# Altium PCB EMG V2.PcbDoc
Units mm, origin at the board's own origin, x right, y up, seen from the top; angles counter-clockwise.
Board outline 20 x 15 mm, 4 copper layers (Top Layer, GND, VCC, Bottom Layer), stack 0.604 mm thick; 34 components, 25 nets, 92 pads, 17 vias.
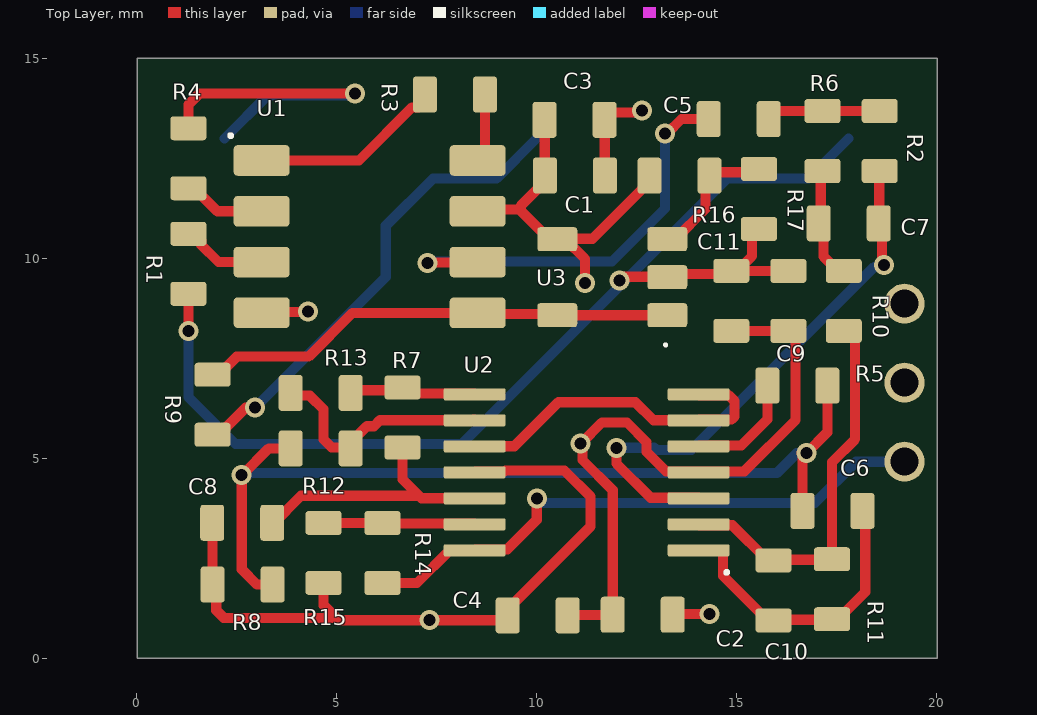
[diagram p0: Top Layer view]
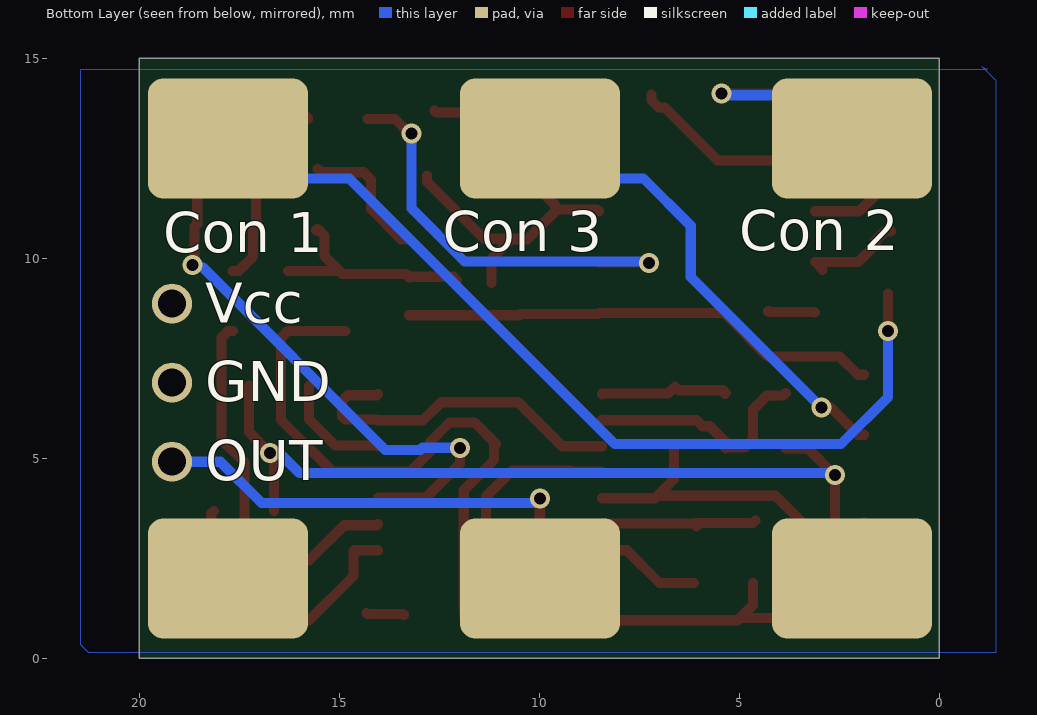
[diagram p1: Bottom Layer view, seen from below]
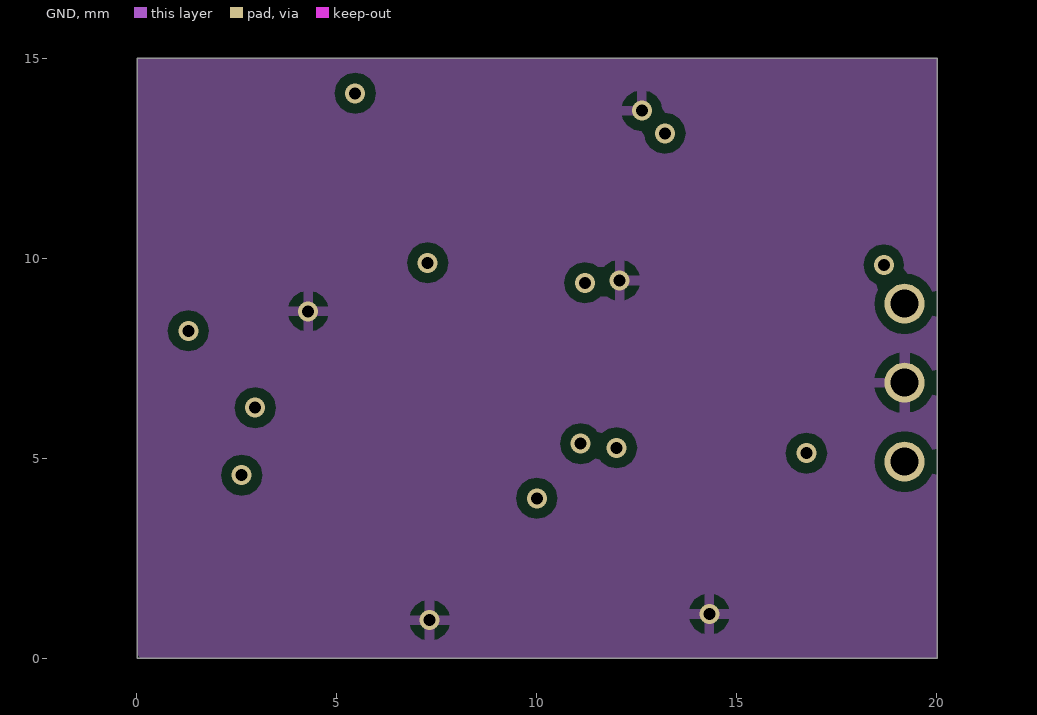
[diagram p2: GND]
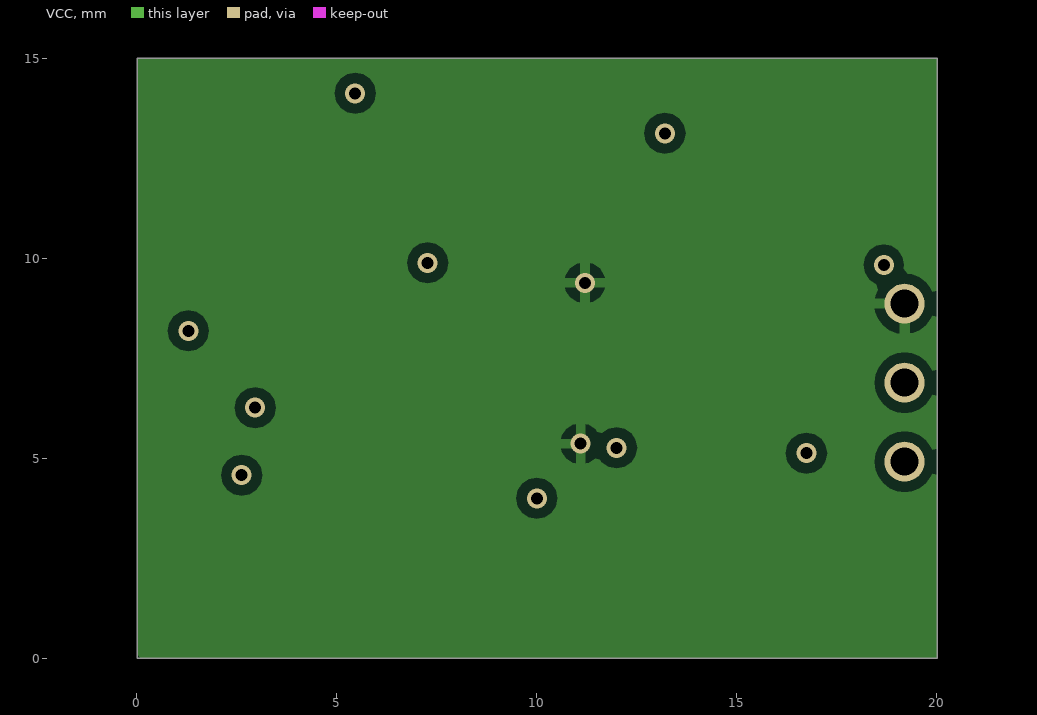
[diagram p3: VCC]

## Layer stack, top to bottom
Top Solder: solder mask 0.01, Solder Resist, Dk 3.5
Top Layer: signal copper 0.036
Dielectric 2: prepreg 0.071, PP-006, Dk 4.1
GND: signal copper 0.035
Dielectric 1: dielectric 0.32, FR-4, Dk 4.8
VCC: signal copper 0.035
Dielectric 3: prepreg 0.071, PP-006, Dk 4.1
Bottom Layer: signal copper 0.036
Bottom Solder: solder mask 0.01, Solder Resist, Dk 3.5

## Board outline
0.018,0.011 20.017,0.011 20.018,0.012 20.018,15.011 0.019,15.011 0.019,0.012

## Design rules (kind name [scope] priority, off if disabled: settings)
Clearance [All] p1: gap=0.254 ignorepadtopadclearanceinfootprint=FALSE except(0: Arc-Hole Track-Hole SMDPad-Hole THPad-Hole Via-Hole Fill-Hole Poly-Hole Region-Hole Text-Hole)
PolygonConnect [All] p1: connectstyle=Relief reliefconductorwidth=0.254 reliefentries=4 polygonreliefangle="90 Angle" airgapwidth=0.254
RoutingVias [All] p1: holewidth=0.711 width=1.27 viastyle="Through Hole" minholewidth=0.711 minwidth=1.27 maxholewidth=0.711 maxwidth=1.27
SolderMaskExpansion [All] p1: expansion=0.102 istentingtop=FALSE
Width [All] p1: maxlimit=0.254 minlimit=0.254 preferedwidth=0.254
30 further rules are at their usual default settings.

## Components (designator, comment, footprint, x,y, rotation, side; value= is the part's Value field where it differs from the comment)
C1 "1uF/50V" "0603 Capacitor" 10.96,12.074 r0 top value=1uF
C2 "1uF/50V" "0603 Capacitor" 12.654,1.094 r0 top value=1uF
C3 "10nF/50V" "0603 Capacitor" 10.95,13.467 r0 top value=10nF
C4 "10nF/50V" "0603 Capacitor" 10.028,1.078 r180 top value=10nF
C5 "220nF/25V" "0603 Capacitor" 15.055,13.486 r0 top value=220nF
C6 "10uF/25V" "0603 Capacitor" 17.397,3.689 r180 top value=10uF
C7 "220nF/25V" "0603 Capacitor" 17.805,10.878 r180 top value=220nF
C8 "10uF/25V" "0603 Capacitor" 2.642,3.392 r180 top value=10uF
C9 "10nF/50V" "0603 Capacitor" 16.296,8.941 r90 top value=10nF
C10 "22nF/25V" "0603 Capacitor" 15.924,1.703 r270 top value=22nF
C11 "1uF/50V" "0603 Capacitor" 14.869,8.941 r90 top value=1uF
"Con 1" "EMG Pad" PCBComponent_1 17.8,13 r180 bottom
"Con 2" "EMG Pad" PCBComponent_1 2.2,13 r180 bottom
"Con 3" "EMG Pad" PCBComponent_1 10,13 r180 bottom
R1 "100k" "0603 Resistor" 1.296,9.868 r90 top
R2 "2k5" "0603 Resistor" 18.579,12.937 r270 top
R3 "10k" "0603 Resistor" 7.96,14.101 r0 top
R4 "100k" "0603 Resistor" 1.296,12.506 r270 top
R5 "1k" "0603 Resistor" 16.521,6.822 r180 top
R6 "150k" "0603 Resistor" 17.152,12.937 r270 top
R7 "10k" "0603 Resistor" 6.648,6.026 r270 top
R8 "1k" "0603 Resistor" 2.65,1.847 r180 top
R9 "100k" "0603 Resistor" 1.901,6.344 r90 top
R10 "5k" "0603 Resistor" 17.682,8.941 r270 top
R11 "250k" "0603 Resistor" 17.387,1.732 r270 top
R12 "1k" "0603 Resistor" 4.604,5.253 r0 top
R13 "1k" "0603 Resistor" 4.604,6.639 r0 top
R14 "3k" "0603 Resistor" 6.149,2.639 r270 top
R15 "330R" "0603 Resistor" 4.677,2.639 r270 top
R16 "10k" "0603 Resistor" 13.575,12.07 r0 top
R17 "10k" "0603 Resistor" 15.562,11.49 r270 top
U1 "LT178910" "SOIC 8 LT178910" 5.828,10.546 r270 top
U2 "OPA4817" "TSSOP14 OPA4187" 11.253,4.655 r90 top
U3 "OPA187" SOT23-5 11.893,9.533 r180 top

## Footprints (in the part's own frame and the unit in brackets; to place one, negate y for a bottom-side part, rotate by r counter-clockwise, add the part's x,y. Pads: shape width x height; smd on the part's side, far side on the other; paste and mask are expansions set on the pad)
"0603 Capacitor" [mm] "0603 Capacitor"
  rrect25% 0.6x0.9 smd paste-0.05 mask+0.075: 1(-0.75,0) 2(0.75,0)
  body extent -0.77,-0.43 0.77,0.43, height 0.45
"0603 Resistor" [mm] "0603 Resistor"
  rrect25% 0.6x0.9 smd paste-0.05 mask+0.075: 1(-0.75,0) 2(0.75,0)
  body extent -0.77,-0.43 0.77,0.43, height 0.45
PCBComponent_1 [mm]
  rrect25% 4x3 smd paste-0.05 mask+0.075: 1(0,0) 2(0,-11)
"SOIC 8 LT178910" [mm] "SOIC 8"
  rrect25% 0.765x1.4 smd paste-0.05 mask+0.075: 1(-1.905,-2.7) 2(-0.635,-2.7) 3(0.635,-2.7) 4(1.9,-2.7) 5(1.905,2.7) 6(0.635,2.7) 7(-0.635,2.7) 8(-1.905,2.7)
  silkscreen extent -2.56,-3.51 -2.49,-3.44, body extent -2.5,-3.08 2.5,3.08, height 2
SOT23-5 [mm] "SOT23-5"
  rrect25% 1x0.6 smd paste-0.05 mask+0.075: 1(-1.375,0.95) 2(-1.375,0) 3(-1.375,-0.95) 4(1.375,-0.95) 5(1.375,0.95)
  silkscreen extent -1.34,1.68 -1.32,1.71, body extent -1.58,-1.5 1.62,1.5, height 0.92
"TSSOP14 OPA4187" [mm] "TSSOP14"
  rrect25% 0.3x1.55 smd paste-0.05 mask+0.075: 1(-1.95,-2.8) 2(-1.3,-2.8) 3(-0.65,-2.8) 4(0,-2.8) 5(0.65,-2.8) 6(1.3,-2.8) 7(1.95,-2.8) 8(1.95,2.8) 9(1.3,2.8) 10(0.65,2.8) 11(0,2.8) 12(-0.65,2.8) 13(-1.3,2.8) 14(-1.95,2.8)
  silkscreen extent -2.54,-3.54 -2.46,-3.46, body extent -2.5,-3.2 2.5,3.2, height 1.21

## Part data
C1 C2 C3 C4 C9 C11: Capacitor Type=Ceramic, Dielectryc=X7R, Manufacturer=Any, Package=0603, Temperature="-55ºC TO +125ºC", Tolerance=20%, Voltage=50V, Manufacturer PN=Any, Mount Type=SMD
C5 C6 C7 C8 C10: Capacitor Type=Ceramic, Dielectryc=X7R, Manufacturer=Any, Package=0603, Temperature="-55ºC TO +125ºC", Tolerance=20%, Voltage=25V, Manufacturer PN=Any, Mount Type=SMD
"Con 1" "Con 2" "Con 3": library part Pad
R1 R2 R4 R6 R9: Manufacturer=Any, Package=0603, Power Dissipation="1/10 W", Temperature="-55°C to 155°C", Tolerance=10%, Manufacturer PN=Any, Mount Type=SMD
  R1 R4 R9: 150k=100k
  R6: 150k=150k
R3 R5 R7 R8 R10 R11 R12 R13 R14 R15 R16 R17: Manufacturer=Any, Package=0603, Power Dissipation="1/10 W", Temperature="-55ºC TO 155ºC", Tolerance=10%, Manufacturer PN=Any, Mount Type=SMD
U1: library part LT178910-2, "Micropower, Single Supply Rail-to-Rail, Output Instrumentation Amplifiers", Manufacturer="Linear Technologiy", Output Current=1mA, Package="SOIC 8", Voltage Range="-36V to 36 V", IC Type=INA, Mount Type=SMD
U2: library part OPA4817-2, "OPAx187, Low Power, Rail-to-Rail Output,36-V Operational Amplifiers", Manufacturer="TEXAS INSTRUMENTS", Output Current="20 mA", Package=TSSOP14, Voltage Range="2.25V to 18V", IC Type=OPAMP, Mount Type=SMD
U3: library part OPA187-2, "OPAx187, Low Power, Rail-to-Rail Output,36-V Operational Amplifiers", Manufacturer="TEXAS INSTRUMENTS", Output Current="20 mA", Package="SOT 23-5", Voltage Range="2.25V to 18V", IC Type=OPAMP, Manufacturer PN=OPA187, Mount Type=SMD

## Free pads (board coordinates)
  round 1 hole 0.7: 1(19.2,4.919) 1(19.2,6.894) 1(19.2,8.87)

## Via types
v1: diameter 0.5, hole 0.3, Top Layer to Bottom Layer, 10 vias
v2: diameter 0.5, hole 0.3, Top Layer to GND, 5 vias
v3: diameter 0.5, hole 0.3, Top Layer to VCC, 2 vias

## Nets (pads, with @x,y where several pads share a name; then routed paths per layer and width w, separated by ;. In a path a pad name is that pad's centre, name@x,y a point inside that pad or via, vN(x,y) a via of type N, cw(c..) or ccw(c..) an arc to the next point about the centre after c; other vN are vias at no path point)
+5: C1.1 C2.1 C3.1 C4.1 C9.1 C11.1 pad.1@19.2,8.87 R16.1 U1.7 U2.4 U3.4 | length 25.6
  Top Layer w0.254: U1.7 8.572,11.225 9.609,11.225 ; C3.1 10.205,13.462 10.205,11.919 9.609,11.323 9.609,11.225 ; C4.1 10.786,1.086 11.896,1.086 11.896,1.236 11.904,1.244 11.904,4.209 11.15,4.963 11.15,5.322 v3(11.103,5.369) 11.633,5.899 12.26,5.899 12.749,5.41 12.749,5.167 13.238,4.678 14.03,4.678 U2.4 14.076,4.678 15.192,4.678 16.476,5.962 16.476,8.018 16.303,8.191 C9.1 C11.1 ; v3(11.211,9.39) 11.211,9.99 10.718,10.483 U3.4 ; R16.1 12.825,11.92 11.399,10.494 10.718,10.494 10.529,10.494 U3.4 ; 9.609,11.225 9.609,11.192 10.318,10.483 U3.4
GND: C1.2 C2.2 C3.2 C4.2 C8.2 C9.2 C11.2 pad.1@19.2,6.894 R8.2 R15.2 R17.2 U1.4 U2.11 U3.2 | length 27.5
  Top Layer w0.254: R8.2@1.889,1.858 1.896,1.865 1.896,3.388 C8.2 ; R8.2@1.993,1.754 1.993,1.203 2.179,1.016 4.991,1.016 ; U1.4 3.146,8.664 4.275,8.664 v2(4.292,8.681) ; R15.2 4.677,1.33 4.991,1.016 ; U2.11 8.476,4.678 9.199,4.678 9.221,4.7 10.695,4.7 11.353,4.042 11.353,3.303 C4.2@9.278,1.228 ; C4.2 9.157,0.957 v2(7.326,0.957) 5.051,0.957 4.991,1.016 ; C1.2@11.705,12.167 11.705,13.462 C3.2 11.7,13.475 11.873,13.648 12.587,13.648 v2(12.634,13.695) ; v2(12.077,9.451) 12.169,9.543 13.258,9.543 U3.2 13.347,9.612 14.94,9.612 C11.2@15.019,9.691 ; C2.2 13.422,1.112 v2(14.319,1.112) v2@14.337,1.13 ; R17.2@15.597,10.705 R17.2 15.56,10.74 15.387,10.567 15.387,10.059 C11.2@15.019,9.691 ; C9.2 C11.2@15.019,9.691
NetC5_1: C5.1 U1.6 | length 10.9
  Top Layer w0.254: v1(7.276,9.89) 7.287,9.901 8.517,9.901 U1.6 ; v1(13.21,13.131) 13.269,13.131 13.624,13.486 C5.1
  Bottom Layer w0.254: v1(7.276,9.89) 7.311,9.925 11.886,9.925 13.21,11.249 v1(13.21,13.131)
NetC5_2: C5.2 R2.1 R6.1 | length 3
  Top Layer w0.254: C5.2@15.825,13.506 C5.2 15.805,13.514 15.978,13.687 R6.1 18.447,13.687 18.458,13.698 18.524,13.632 R2.1
NetC6_1: C6.1 C10.2 R11.2 U2.1 | length 7.5
  Top Layer w0.254: U2.1 14.64,2.705 14.663,2.682 14.663,2.063 15.774,0.953 C10.2 15.938,0.967 17.373,0.967 R11.2 ; R11.2@17.538,0.982 18.218,1.663 18.218,3.618 C6.1
NetC6_2: C6.2 R5.1 R8.1 R12.1 | length 22.7
  Top Layer w0.254: R8.1 3.013,1.847 2.628,2.232 v1(2.628,4.582) 2.638,4.582 3.309,5.253 R12.1 ; C6.2 16.647,5.111 16.626,5.132 v1(16.748,5.132) 17.271,5.655 R5.1 R5.1@17.207,6.758
  Bottom Layer w0.254: v1(2.628,4.582) 2.675,4.629 2.849,4.629 2.855,4.635 16.007,4.635 16.504,5.132 v1(16.748,5.132)
NetC7_1: C7.1 R2.2 U2.3 | length 13.8
  Top Layer w0.254: v1(11.999,5.268) 11.999,4.871 12.853,4.017 14.041,4.017 U2.3 ; R2.2 18.567,12.175 18.567,10.89 C7.1 18.634,10.799 18.634,9.885 v1(18.681,9.838)
  Bottom Layer w0.254: v1(11.999,5.268) 12.939,5.268 12.994,5.213 13.868,5.213 18.446,9.791 18.634,9.791 v1(18.681,9.838)
NetC8_1: C8.1 R7.2 U2.12 | length 6.7
  Top Layer w0.254: C8.1@3.414,3.37 4.113,4.07 7.059,4.07 ; R7.2 6.648,4.481 7.059,4.07 ; U2.12 7.124,4.005 7.059,4.07
NetC10_1: C10.1 R10.2 R11.1 U2.2 | length 9.9
  Top Layer w0.254: U2.2 14.076,3.332 14.895,3.332 15.774,2.453 C10.1 15.938,2.468 17.373,2.468 R11.1 ; R11.1@17.387,2.483 17.387,4.906 17.965,5.484 17.965,8.018 17.792,8.191 R10.2
"NetCon 1_1": "Con 1.1" R1.1 | length 22.7
  Top Layer w0.254: v1(1.296,8.191) R1.1
  Bottom Layer w0.254: v1(1.296,8.191) 1.296,6.539 2.473,5.362 8.127,5.362 14.767,12.002 16.802,12.002 17.8,13
"NetCon 2_1": "Con 2.1" R4.1 | length 8.6
  Top Layer w0.254: R4.1 1.296,13.845 1.58,14.129 v1(5.467,14.129)
  Bottom Layer w0.254: 2.2,13 3.282,14.082 5.42,14.082 v1(5.467,14.129)
"NetCon 3_1": "Con 3.1" R9.1 | length 12
  Top Layer w0.254: R9.1 2.051,5.594 2.726,6.269 v1(2.963,6.269)
  Bottom Layer w0.254: v1@2.989,6.243 v1(2.963,6.269) 6.231,9.537 6.231,10.819 7.414,12.002 9.002,12.002 10,13
NetR1_2: R1.2 U1.3 | length 2.4
  Top Layer w0.254: R1.2@1.232,10.682 1.383,10.682 1.619,10.445 1.619,10.339 2.047,9.911 3.001,9.911 U1.3 ; U1.3@2.937,9.721 U1.3@3.001,9.784
NetR3_1: R3.1 U1.1 | length 4.9
  Top Layer w0.254: U1.1 5.56,12.451 6.887,13.778 7.037,13.778 7.21,13.951 R3.1
NetR3_2: R3.2 U1.8 | length 2
  Top Layer w0.254: U1.8@8.21,12.451 U1.8 8.71,12.633 R3.2
NetR4_2: R4.2 U1.2 | length 2.1
  Top Layer w0.254: R4.2 1.446,11.756 2.021,11.181 U1.2
NetR5_2: R5.2 U2.5 | length 2.8
  Top Layer w0.254: U2.5 14.076,5.328 15.123,5.328 15.771,5.976 R5.2
NetR7_1: R7.1 R13.2 U2.8 | length 3.3
  Top Layer w0.254: R13.2@5.376,6.617 R13.2 5.423,6.708 6.535,6.708 6.626,6.799 R7.1 6.796,6.628 8.43,6.628 U2.8
NetR9_2: R9.2 U1.5 U3.1 U3.5 | length 12
  Top Layer w0.254: R9.2 2.051,7.094 2.504,7.547 4.303,7.547 5.397,8.641 U1.5 8.557,8.612 10.489,8.612 U3.5 U3.1
NetR12_2: R12.2 R13.1 U2.9 | length 6
  Top Layer w0.254: R13.1 3.922,6.571 4.331,6.571 4.672,6.23 4.672,5.48 4.876,5.276 R12.2@5.331,5.276 ; R12.2 5.354,5.403 5.759,5.808 5.935,5.808 6.084,5.957 8.409,5.957 8.43,5.978 U2.9
NetR14_1: R14.1 R15.1 U2.13 | length 4.1
  Top Layer w0.254: R15.1@4.614,3.453 R15.1 R14.1 ; R14.1@6.008,3.38 6.087,3.301 6.158,3.372 8.436,3.372 U2.13
NetR16_2: R16.2 R17.1 U3.3 | length 3.4
  Top Layer w0.254: U3.3 13.468,10.483 14.224,11.239 14.224,11.969 R16.2 14.41,12.155 15.477,12.155 R17.1
NetU2_6: U2.6 U2.7 U2.10 | length 8.5
  Top Layer w0.254: U2.10 9.444,5.305 10.546,6.407 12.471,6.407 12.923,5.955 U2.6 14.076,5.978 14.876,5.978 14.951,6.053 14.951,6.433 14.802,6.582 14.076,6.582 U2.7
Ref: C7.2 R6.2 R10.1 | length 2.9
  Top Layer w0.254: R6.2@17.169,12.171 R6.2 17.103,12.138 17.103,10.927 C7.2 17.176,10.757 17.176,10.047 17.532,9.691 R10.1
V_OUT: pad.1@19.2,4.919 R14.2 U2.14 | length 14.7
  Top Layer w0.254: R14.2 7.012,1.889 7.828,2.705 U2.14 8.476,2.728 9.268,2.728 10.006,3.466 v1(10.006,4.004)
  Bottom Layer w0.254: v1(10.006,4.004) 10.124,3.886 16.958,3.886 17.991,4.919 pad.1@19.218,4.919
pads on no net: "Con 1.2" "Con 2.2" "Con 3.2"

## Polygon pours and split planes (outlines as drawn)
GND on Bottom Layer "NONET_L04_P001" (solid, shelved, pour order 1): -1.186,14.742 -1.161,14.717 21.498,14.717 21.498,0.355 21.297,0.154 -1.412,0.154 -1.412,14.441 -1.061,14.792
no net on Bottom Layer "NONET_L04_P000" (solid, pour order 0): 10.2,6.599
+5 on VCC "+5_L03_P004" (solid, pour order 4): 0.019,15.011 20.018,15.011 20.018,0.012 20.017,0.011 0.018,0.011
GND on GND "GND_L02_P006" (solid, pour order 6): 0.019,15.011 20.018,15.011 20.018,0.012 0.018,0.012

## Silkscreen, mask and mechanical layers (free items; w line width, h text height)
Bottom Overlay:
  text "Vcc" at 18.366,8.388 h1
  text "GND" at 18.366,6.437 h1
  text "OUT" at 18.366,4.452 h1
Mechanical 13:
  the board outline again, w0.1